# Altium PCB STM32F030.PcbDoc
Units mil, origin at the board's own origin, x right, y up, seen from the top; angles counter-clockwise.
Board outline 3555 x 3160 mil, 2 copper layers (Top Layer, Bottom Layer); 57 components, 68 nets, 257 pads, 42 vias.
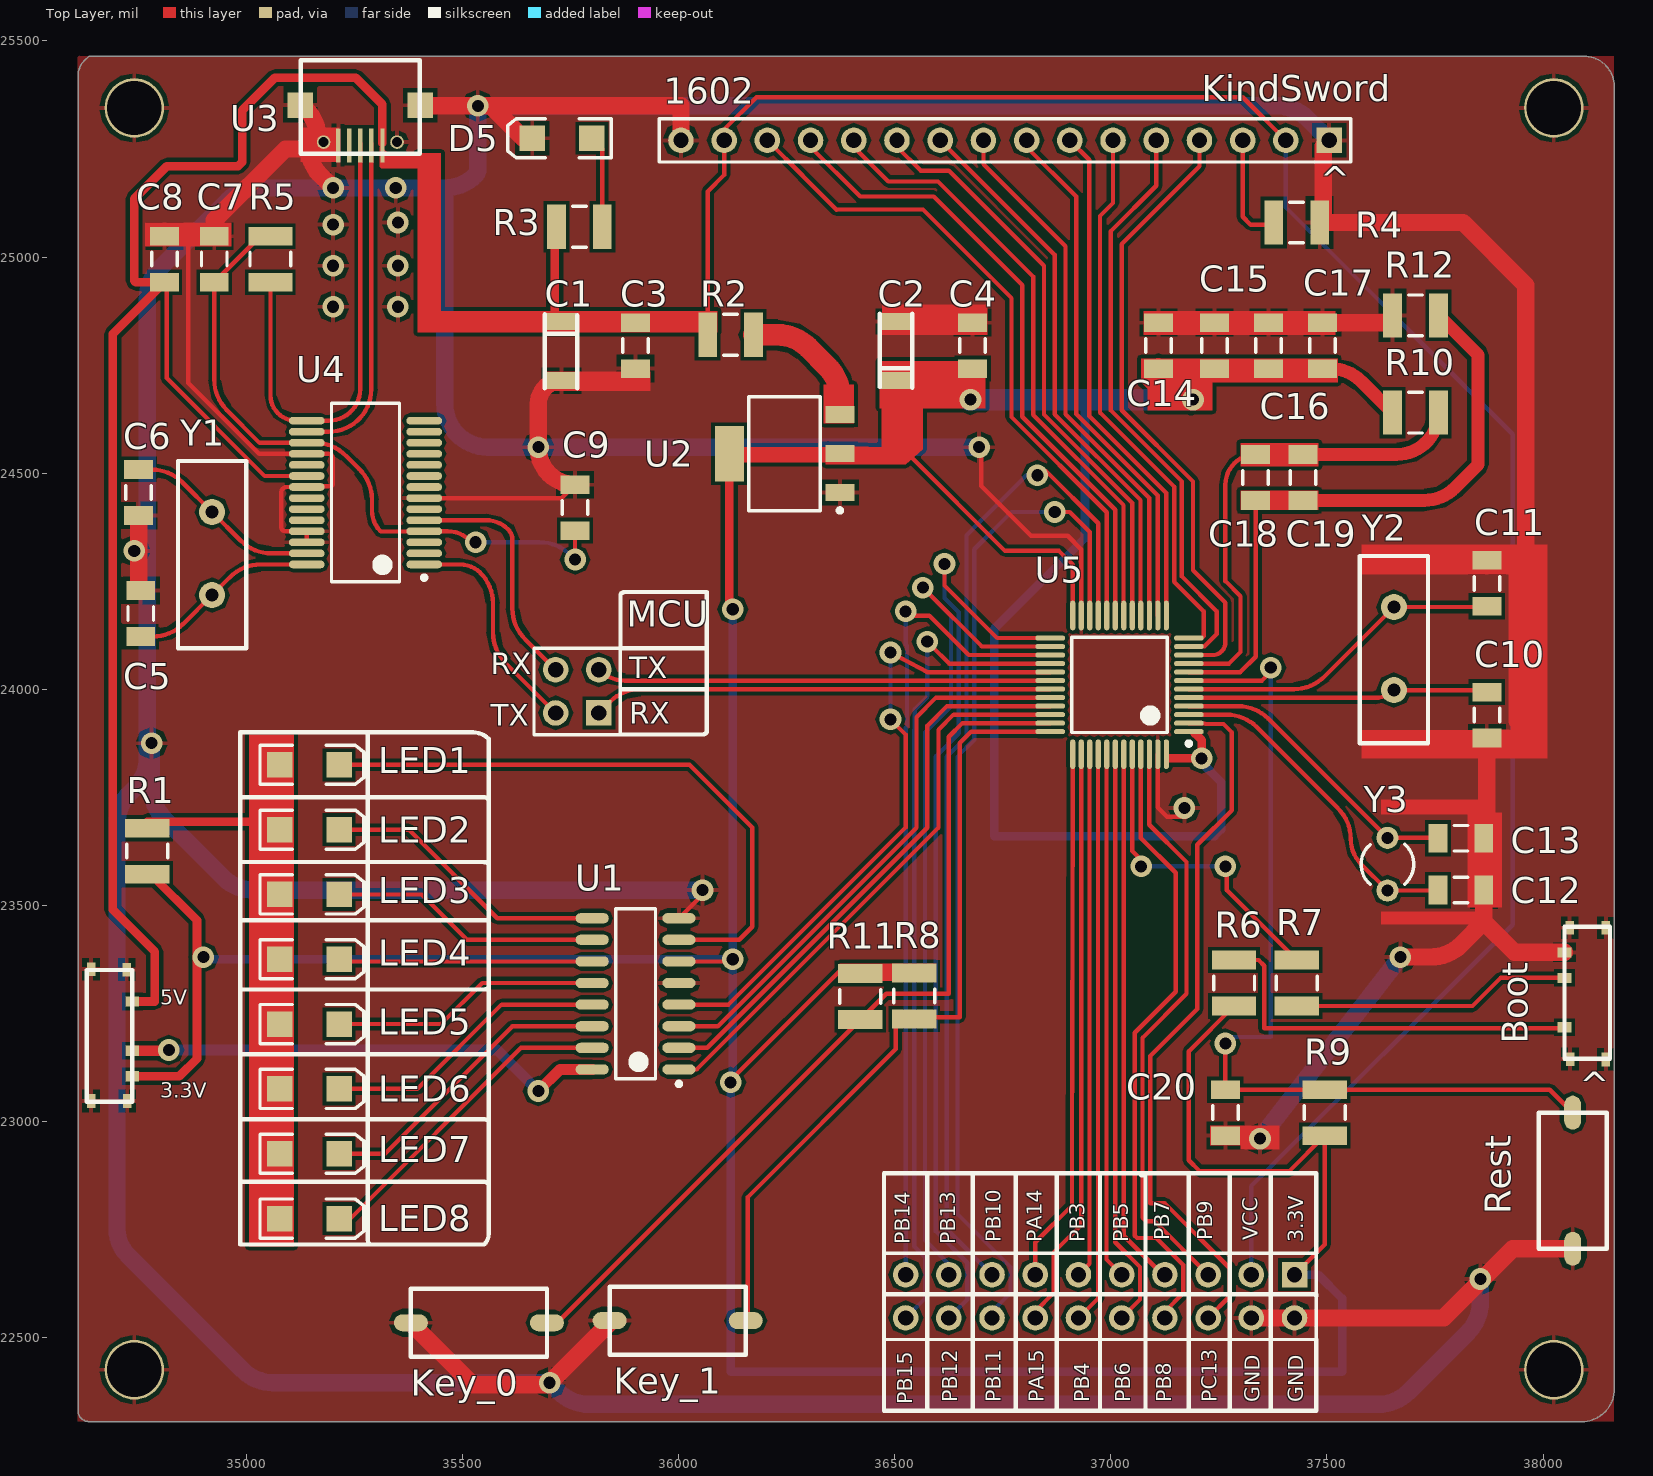
[diagram p0: Top Layer view]
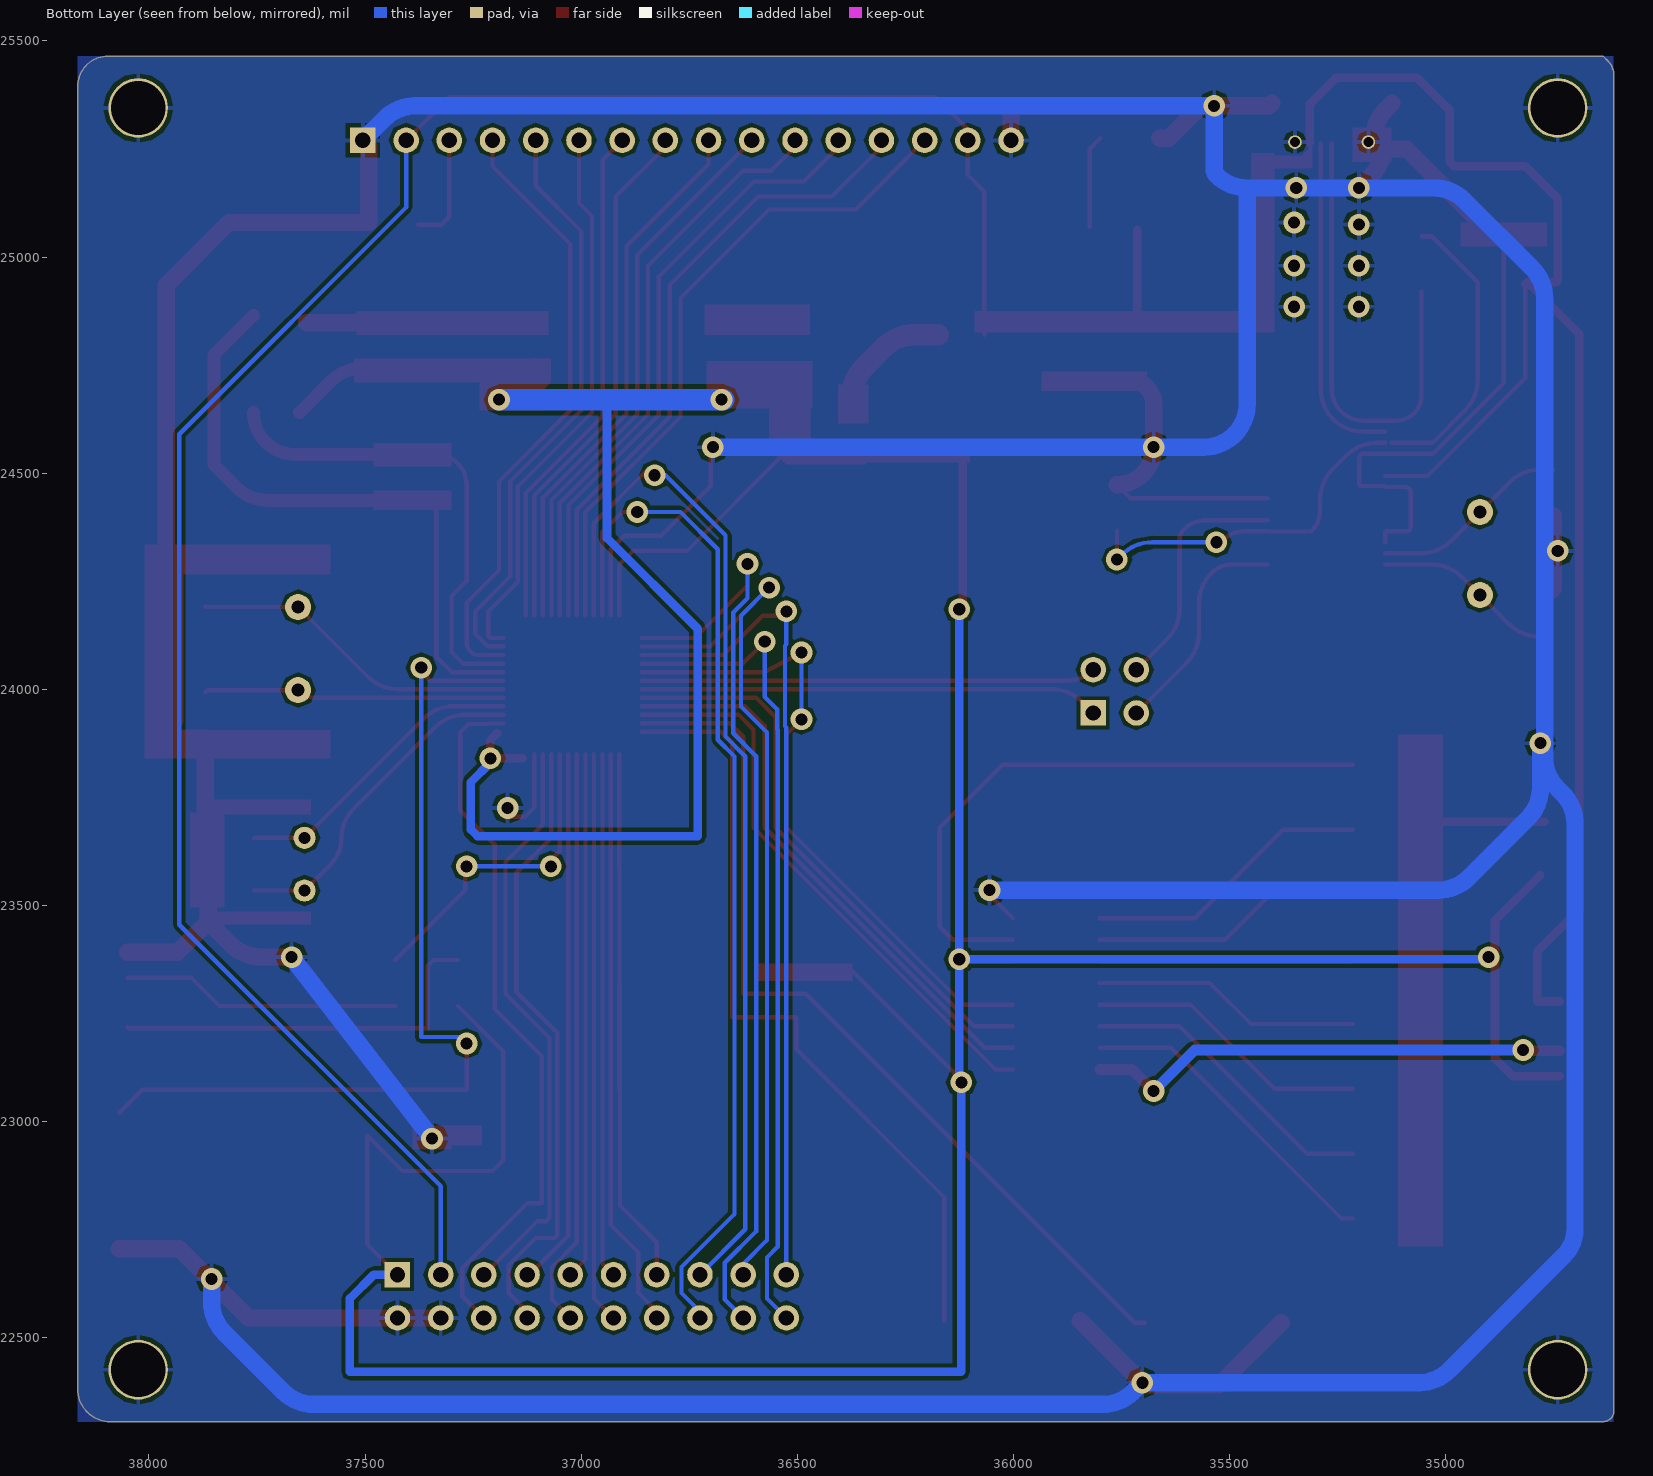
[diagram p1: Bottom Layer view, seen from below]

## Layer stack, top to bottom
Top Layer: signal copper 1.4
Dielectric: dielectric 12.6, FR-4, Dk 4.8
Bottom Layer: signal copper 1.4

## Board outline
34635,25465 34622.93,25452.93 ccw(c34654.14,25421.72) 34610,25421.72 34610,22340 34610,22330 ccw(c34635,22330) 34635,22305 38090,22305 ccw(c38090,22380) 38165,22380 38165,25395 ccw(c38095,25395) 38095,25465

## Design rules (kind name [scope] priority, off if disabled: settings)
Clearance chip_stm32 [InComponent('U5') vs InComponent('U5')] p1: gap=5
Clearance chip_pl2303 [InComponent('U4') vs InComponent('U4')] p2: gap=5
Clearance chip_pl2303_1 [(InComponent('U4') AND InComponent('U5')) vs InPolygon] p3: gap=5
Clearance [All] p4: gap=8
PolygonConnect [All] p1: connectstyle=Relief reliefconductorwidth=10 reliefentries=4 polygonreliefangle="90 Angle" airgapwidth=10
RoutingVias [All] p1: holewidth=28 width=50 viastyle="Through Hole" minholewidth=28 minwidth=50 maxholewidth=28 maxwidth=50
SolderMaskExpansion [All] p1: expansion=4
Width w_vcc [InNet('USB-VCC')] p1: maxlimit=50 minlimit=10 preferedwidth=20
Width w_gnd [InNet('GND')] p2: maxlimit=100 minlimit=10 preferedwidth=40
Width [All] p3: maxlimit=100 minlimit=10 preferedwidth=10
28 further rules are at their usual default settings.

## Classes and differential pairs
component class STM32核心板: C10 C11 C12 C13 C14 C15 C16 C17 C18 C19 C20 R6 R7 R8 R9 R10 R11 R12 U5 Y2 Y3
component class 电源串口: 1602 C1 C2 C3 C4 C5 C6 C7 C8 C9 D5 LED1 LED2 LED3 LED4 LED5 LED6 LED7 LED8 MCU R1 R2 R3 R4 R5 U1 U2 U4 Y1
differential pair class USB: USB_D

## Components (designator, comment, footprint, x,y, rotation, side; value= is the part's Value field where it differs from the comment)
1602 "Header 16" HDR1X16 37505,25270 r180 top (schematic designator P1)
Boot "七脚拨动开关" 七脚拨动开关 38155,23450 r270 top (schematic designator H2)
C1 "47uF" A型坦电容 35690,24710 r90 top
C2 "47uF" A型坦电容 36540,24855 r270 top
C3 "Cap Semi" C1206 35900,24795 r90 top
C4 "Cap Semi" C1206 36680,24795 r270 top
C5 "Cap Semi" C1206 34755,24175 r90 top
C6 "Cap Semi" C1206 34750,24455 r270 top
C7 "Cap Semi" C1206 34925,24995 r90 top
C8 "Cap Semi" C1206 34810,24995 r90 top
C9 "Cap Semi" C1206 35760,24420 r90 top
C10 "Cap Semi" C1206 37870,23940 r90 top
C11 "Cap Semi" C1206 37870,24245 r270 top
C12 "Cap Semi" C1206 37810,23535 r180 top
C13 "Cap Semi" C1206 37810,23655 r180 top
C14 "Cap Semi" C1206 37110,24795 r270 top
C15 "Cap Semi" C1206 37240,24795 r270 top
C16 "Cap Semi" C1206 37365,24795 r270 top
C17 "Cap Semi" C1206 37490,24795 r270 top
C18 "Cap Semi" C1206 37335,24490 r90 top
C19 "Cap Semi" C1206 37445,24490 r90 top
C20 "Cap Semi" C1206 37265,23020 r90 top
D5 "LED2" 3.2X1.6X1.1 35730,25275 r180 top
H1 "七脚拨动开关" 七脚拨动开关 34630,23045 r90 top
Key_0 "微动开关" 微动开关 35695,22455 r180 top (schematic designator H5)
Key_1 "微动开关" 微动开关 36155,22460 r180 top (schematic designator H3)
LED1 "LED2" 3.2X1.6X1.1 35145,23825 r0 top (schematic designator D9)
LED2 "LED2" 3.2X1.6X1.1 35145,23675 r0 top (schematic designator D8)
LED3 "LED2" 3.2X1.6X1.1 35145,23525 r0 top (schematic designator D7)
LED4 "LED1" 3.2X1.6X1.1 35145,23375 r0 top (schematic designator D6)
LED5 "LED2" 3.2X1.6X1.1 35145,23225 r0 top (schematic designator D4)
LED6 "LED2" 3.2X1.6X1.1 35145,23075 r0 top (schematic designator D3)
LED7 "LED2" 3.2X1.6X1.1 35145,22925 r0 top (schematic designator D2)
LED8 "LED2" 3.2X1.6X1.1 35145,22775 r0 top (schematic designator D1)
MCU "Header 2X2" HDR2X2 35815,23945 r90 top (schematic designator P2)
P3 "Header 10X2" HDR2X10 37425,22645 r180 top
R1 "Res3" 14-1210 34770,23625 r270 top
R2 "Res3" 14-1210 36120,24820 r0 top
R3 "Res3" 14-1210 35770,25070 r0 top
R4 "Res3" 14-1210 37430,25080 r180 top
R5 "Res3" 14-1210 35055,24995 r270 top
R6 "Res3" 14-1210 37285,23320 r270 top
R7 "Res3" 14-1210 37430,23320 r270 top
R8 "Res3" 14-1210 36545,23290 r270 top
R9 "Res3" 14-1210 37495,23020 r90 top
R10 "Res3" 14-1210 37705,24640 r0 top
R11 "Res3" 14-1210 36420,23288.86 r270 top
R12 "Res3" 14-1210 37705,24865 r0 top
Rest "微动开关" 微动开关 37990,22705 r90 top (schematic designator H4)
U1 "74HC138" 74HC138 35900,23295 r180 top
U2 "AMS1117-3.3V" AMS1117 36245,24545 r180 top
U3 "USB母座" MicroUSB母座 35273,25361 r0 top
U4 "PL2303HX" PL2303HX 35275,24455 r180 top
U5 "STM32F030" TSQFP50P900X900X160-48N 37020,24010 r180 top
Y1 "12MHZ" 晶振 34920,24410 r270 top
Y2 "8MHZ" 晶振 37655,24190 r270 top
Y3 "XTAL" R38 37640,23595 r0 top

## Footprints (in the part's own frame and the unit in brackets; to place one, negate y for a bottom-side part, rotate by r counter-clockwise, add the part's x,y. Pads: shape width x height; smd on the part's side, far side on the other; paste and mask are expansions set on the pad)
3.2X1.6X1.1 [mm] "SMT LED; 2 Flat Leads"
  rect 1.5x1.5 smd: 1(-1.75,0) 2(1.75,0)
  silkscreen extent -2.9,-1.15 3.2,1.15
14-1210 [mm] "Chip Resistor, Body 3.2x2.5mm, IPC High Density"
  rect 1.1x2.6 smd: 1(-1.35,0) 2(1.35,0)
  silkscreen extent -0.4,-1.2 0.4,1.2, body extent -1.68,-1.32 1.68,1.32, height 0.9
74HC138 [mm] "SOP, 16-Leads, Body 9.90x3.90mm, Pitch 1.27mm, IPC Medium Density"
  oval 1.95x0.6 smd: 1(-2.55,4.445) 2(-2.55,3.175) 3(-2.55,1.905) 4(-2.55,0.635) 5(-2.55,-0.635) 6(-2.55,-1.905) 7(-2.55,-3.175) 8(-2.55,-4.445) 9(2.55,-4.445) 10(2.55,-3.175) 11(2.55,-1.905) 12(2.55,-0.635) 13(2.55,0.635) 14(2.55,1.905) 15(2.55,3.175) 16(2.55,4.445)
  silkscreen extent -2.68,-5 1.17,5.42, body extent -2,-5 2,5, height 1.75
AMS1117 [mm] "SOT223, 4-Leads, Body 6.50x7.00mm (avg), Pitch 2.29mm, IPC Medium Density"
  rect 1.7x1 smd: 1(-3.25,2.29) 2(-3.25,0) 3(-3.25,-2.29)
  rect 1.7x3.25 smd: 2(3.25,0)
  silkscreen extent -3.38,-3.35 2.1,3.46, body extent -1.86,-3.35 1.86,3.35, height 1.8
A型坦电容 [mm]
  rect 1x1.8 smd: 0(0.1,-0.975) 1(3.575,-0.975)
  silkscreen extent -0.35,-1.9 4,0
C1206 [mm] "Chip Capacitor, Body 3.2x1.6mm, IPC High Density"
  rect 1.1x1.7 smd: 1(-1.35,0) 2(1.35,0)
  silkscreen extent -0.4,-0.75 0.4,0.75, body extent -1.7,-0.9 1.7,0.9, height 1.3
HDR1X16 [mm] "Connector; Header; 16 Position"
  rect 1.5x1.5 hole 0.9: 1(0,0)
  round 1.5 hole 0.9: 2(2.54,0) 3(5.08,0) 4(7.62,0) 5(10.16,0) 6(12.7,0) 7(15.24,0) 8(17.78,0) 9(20.32,0) 10(22.86,0) 11(25.4,0) 12(27.94,0) 13(30.48,0) 14(33.02,0) 15(35.56,0) 16(38.1,0)
  silkscreen extent -1.27,-1.27 39.37,1.27
HDR2X2 [mm] "Connector; Header; 2x2 Position"
  rect 1.5x1.5 hole 0.9: 1(0,0)
  round 1.5 hole 0.9: 2(0,2.54) 3(2.54,0) 4(2.54,2.54)
  silkscreen extent -1.27,-1.27 3.81,3.81
HDR2X10 [mm] "Connector; Header; 10x2 Position"
  rect 1.5x1.5 hole 0.9: 1(0,0)
  round 1.5 hole 0.9: 2(0,2.54) 3(2.54,0) 4(2.54,2.54) 5(5.08,0) 6(5.08,2.54) 7(7.62,0) 8(7.62,2.54) 9(10.16,0) 10(10.16,2.54) 11(12.7,0) 12(12.7,2.54) 13(15.24,0) 14(15.24,2.54) 15(17.78,0) 16(17.78,2.54) 17(20.32,0) 18(20.32,2.54) 19(22.86,0) 20(22.86,2.54)
  silkscreen extent -1.27,-1.27 24.13,3.81
MicroUSB母座 [mm]
  rect 0.25x2 smd: 1(1.046,-2.6) 2(0.396,-2.6) 3(-0.254,-2.6) 4(-0.904,-2.6) 5(-1.554,-2.6)
  rect 1.5x1.5 smd: GND(-3.779,-0.25) GND(3.271,-0.25)
  round 0.8 hole 0.6: GND(-2.413,-2.413) GND(1.905,-2.413)
  silkscreen extent -3.75,-3.1 3.25,2.4
PL2303HX [mm] "SOP, 28-Leads, Body 10.20x5.30mm, Pitch 0.65mm, IPC Medium Density"
  oval 2.1x0.45 smd: 1(-3.45,4.225) 2(-3.45,3.575) 3(-3.45,2.925) 4(-3.45,2.275) 5(-3.45,1.625) 6(-3.45,0.975) 7(-3.45,0.325) 8(-3.45,-0.325) 9(-3.45,-0.975) 10(-3.45,-1.625) 11(-3.45,-2.275) 12(-3.45,-2.925) 13(-3.45,-3.575) 14(-3.45,-4.225) 15(3.45,-4.225) 16(3.45,-3.575) 17(3.45,-2.925) 18(3.45,-2.275) 19(3.45,-1.625) 20(3.45,-0.975) 21(3.45,-0.325) 22(3.45,0.325) 23(3.45,0.975) 24(3.45,1.625) 25(3.45,2.275) 26(3.45,2.925) 27(3.45,3.575) 28(3.45,4.225)
  silkscreen extent -3.58,-5.25 2,5.25, body extent -2.8,-5.25 2.8,5.25, height 2
R38 [mm] "Crystal, Thru-Hole; 2 Leads; Body 3.1 x 8.2 mm (Dia.xH)"
  round 1.3 hole 0.7: 1(0,1.55) 2(0,-1.55)
  silkscreen extent -1.55,-1.19 1.55,1.17
TSQFP50P900X900X160-48N [mm] "TSQFP, 48-Leads, Body 7.00x7.30mm, Pitch 0.50mm, IPC Medium Density"
  oval 1.75x0.3 smd: 1(-4.075,2.75) 2(-4.075,2.25) 3(-4.075,1.75) 4(-4.075,1.25) 5(-4.075,0.75) 6(-4.075,0.25) 7(-4.075,-0.25) 8(-4.075,-0.75) 9(-4.075,-1.25) 10(-4.075,-1.75) 11(-4.075,-2.25) 12(-4.075,-2.75) 25(4.075,-2.75) 26(4.075,-2.25) 27(4.075,-1.75) 28(4.075,-1.25) 29(4.075,-0.75) 30(4.075,-0.25) 31(4.075,0.25) 32(4.075,0.75) 33(4.075,1.25) 34(4.075,1.75) 35(4.075,2.25) 36(4.075,2.75)
  oval 0.3x1.75 smd: 13(-2.75,-4.075) 14(-2.25,-4.075) 15(-1.75,-4.075) 16(-1.25,-4.075) 17(-0.75,-4.075) 18(-0.25,-4.075) 19(0.25,-4.075) 20(0.75,-4.075) 21(1.25,-4.075) 22(1.75,-4.075) 23(2.25,-4.075) 24(2.75,-4.075) 37(2.75,4.075) 38(2.25,4.075) 39(1.75,4.075) 40(1.25,4.075) 41(0.75,4.075) 42(0.25,4.075) 43(-0.25,4.075) 44(-0.75,4.075) 45(-1.25,4.075) 46(-1.75,4.075) 47(-2.25,4.075) 48(-2.75,4.075)
  silkscreen extent -4.2,-2.8 2.8,3.57, body extent -3.5,-3.65 3.5,3.65, height 1.6
七脚拨动开关 [mm]
  rect 0.6x0.8 smd: 1(1.5,-2.675) 2(3,-2.675) 3(5.9,-2.675)
  rect 0.8x0.5 smd: GND(0.05,-0.25) GND(0.05,-2.375) GND(7.775,-2.35) GND(7.8,-0.25)
  silkscreen extent 0,-2.68 7.75,0
微动开关 [mm]
  oval 2x1 smd: 1(0,-2) 2(8,-2)
  silkscreen extent 0,-4 8,0
晶振 [mil]
  round 60 hole 30: 1(0,0) 2(192.13,0)
  silkscreen extent -118,-79 315,79

## Part data
1602: "Header, 16-Pin"
Boot H1 Key_0 Key_1 Rest: "H?"
C1 C2: library part A型坦电容
C3 C4 C5 C6 C7 C8 C9 C10 C11 C12 C13 C14 C15 C16 C17 C18 C19 C20: "Capacitor (Semiconductor SIM Model)"
D5 LED1 LED2 LED3 LED5 LED6 LED7 LED8: "Typical RED, GREEN, YELLOW, AMBER GaAs LED"
LED4: library part LED2, "Typical RED, GREEN, YELLOW, AMBER GaAs LED"
MCU: "Header, 2-Pin, Dual row"
P3: "Header, 10-Pin, Dual row"
R1 R2 R3 R4 R5 R6 R7 R8 R9 R10 R11 R12: "Resistor"
U2: library part AMS1117
U3: library part MicroUSB母座, "U?"
U5: library part STM32F030C8T6, "U?"
Y1 Y2: library part 晶振, "Y?"
Y3: "Crystal Oscillator"

## Free pads (board coordinates)
  round 137.8 hole 125.98: GND(34740,22425) GND(34740,25345) GND(38025,22425) GND(38025,25345)

## Via types
v1: diameter 50, hole 28, Top Layer to Bottom Layer, 42 vias

## Nets (pads, with @x,y where several pads share a name; then routed paths per layer and width w, separated by ;. In a path a pad name is that pad's centre, name@x,y a point inside that pad or via, vN(x,y) a via of type N, cw(c..) or ccw(c..) an arc to the next point about the centre after c; other vN are vias at no path point)
BOOT0: R7.1 U5.44 | length 726.2
  Top Layer w10: U5.44 37049.53,23625.47 v1@37065,23610 ; v1(37265,23590) 37268.15,23586.85 37268.15,23535 R7.1
  Bottom Layer w10: v1(37070,23590) v1(37265,23590)
GND: 1602.1 1602.16 Boot.1 Boot.GND C1.0 C2.0 C3.1 C4.1 C5.2 C6.2 C7.2 C8.2 C9.2 C10.1 C11.1 C12.1 C13.1 C14.1 C15.1 C16.1 C17.1 C20.1 D5.2 H1.GND Key_0.2 Key_1.2 P3.2 P3.4 pad.GND R4.1 R12.1 Rest.1 U1.5 U1.8 U2.1 U3.5 U3.GND U4.7 U4.18 U4.21 U4.25 U4.26 U5.23 U5.47 | length 20998.3
  Top Layer w10: 34865,25045 34865,24708.74 35029.17,24544.57 U4.18 35186.05,24544.57 ; U4.26 U4.25@35139.17,24365 ; U4.25 35089.4,24365.43 cw(c35089.4,24374.83) 35080,24374.83 35080,24455 cw(c35092.8,24455) 35092.8,24467.8 U4.21 cw(c35141.38,24467.8) 35141.38,24470 35195,24470 ccw(c35195,24474.27) 35199.27,24474.27 35199.27,24535 ccw(c35189.7,24535) 35189.7,24544.57 ; U4.7 35729.06,24442.2 C9.2 ; U1.8 36047.65,23517.26 ccw(c36029.91,23535) v1(36055,23535) ; v1@36700,24550 36700,24470 36815,24355 36900,24355 36931.42,24323.58 U5.23 ; U5.47 37108.58,23726.42 37130,23705 v1@37175,23705 ; C20.1@37289.85,22960 v1@37330,22960 ; R12.1@37635,24848.15 ccw(c37635,24865) R12.1 ; C13.1 ccw(c37846.61,23671.54) C13.1@37870,23671.54 ; C11.1@37872.04,24298.15 cw(c37872.04,24202.04) 37940,24270 ; 37917.4,23886.85 ccw(c37917.4,23897.6) 37925,23890 ccw(c37888.79,23926.21) 37940,23926.21
  Top Layer w40: C6.2 34750,24233.15 C5.2 ; C7.2 34925,25085 35090,25250 35145,25250 ccw(c35229.5,25250) 35169.75,25190.25 v1(35200,25160) ; U3.GND@35124.02,25355.67 35136.94,25342.75 cw(c35069.19,25275) 35165,25275 ; Key_0.2 35523.78,22390 35696.3,22390 v1(35701.3,22395) Key_1.2@35845.04,22538.74 ; U3.GND@35401.57,25355.67 35407.24,25350 v1(35535,25350) 35565,25350 ; D5.2 35640,25275 35565,25350 ; C1.0 ccw(c35728.39,24660.55) 35675,24660.55 v1(35675,24560) 35675,24558.15 ccw(c35760,24558.15) C9.2 ; 1602.16 36005,25350 35565,25350 ; P3.4 P3.2 37770,22545 37930,22705 Rest.1 ; C17.1 R12.1@37635,24848.15 ; 1602.1 37491.61,25256.61 37491.61,25080 37815,25080 37960,24935 37960,24300 ; v1(37670,23380) 37739.88,23380 ccw(c37739.88,23480) 37810.59,23409.29 37863.15,23461.85 ; C13.1 C12.1 37863.15,23461.85 ; C13.1@37870,23671.54 C10.1 37917.4,23886.85 ; C11.1 C11.1@37872.04,24298.15 ; 37940,23926.21 37940,24270 ; Boot.1 37934.06,23390.94 37863.15,23461.85
  Bottom Layer w40: v1(34780,23875) 34780,23771.42 ccw(c34880,23771.42) 34809.29,23700.71 34945.71,23564.29 ccw(c35016.42,23635) 35016.42,23535 v1(36055,23535) ; v1(36695,24560) v1(35675,24560) 35558.58,24560 cw(c35558.58,24660) 35458.58,24660 35458.58,25160 ; v1(37345,22960) v1(37670,23380) ; 1602.1 37454.29,25320.71 ccw(c37383.58,25250) 37383.58,25350 v1(35535,25350) 35535,25203.08 cw(c35515.5,25203.08) 35529.29,25189.29 cw(c35458.58,25260) 35458.58,25160 ; v1(37855,22635) 37855,22581.42 cw(c37755,22581.42) 37825.71,22510.71 37689.29,22374.29 cw(c37618.58,22445) 37618.58,22345 35792.72,22345 cw(c35792.72,22445) 35722.01,22374.29 v1(35701.3,22395) 35061.42,22395 cw(c35061.42,22495) 34990.71,22424.29 34725,22690 cw(c34785.36,22750.36) 34700,22750.36 34700,23688.58 cw(c34800,23688.58) 34729.29,23759.29 34740.71,23770.71 ccw(c34670,23841.42) 34770,23841.42 34770,24320 34770,24903.58 cw(c34870,24903.58) 34799.29,24974.29 34955.71,25130.71 cw(c35026.42,25060) 35026.42,25160 v1(35200,25160) v1(35345,25160) 35458.58,25160
  other v1: 37170,23725 34740,24320 35200,24885 35350,24885 35200,24980 35350,24980 35200,25075 35350,25080
KEY_0: Key_0.1 R11.2 U5.35 | length 2087.9
  Top Layer w10: Key_0.1 35718.74,22533.74 36480,23295 36625,23295 36625,23890 36656.42,23921.42 U5.35
KEY_1: Key_1.1 R8.2 U5.36 | length 1846.4
  Top Layer w10: Key_1.1@36160,22538.74 36160,22825 36502.24,23167.24 36502.24,23241.1 36650,23241.1 36650,23875 36676.73,23901.73 U5.36
MCU_38_A0: U1.1 U5.34 | length 1331.9
  Top Layer w10: U1.1 36041.37,23120 36601,23679.63 36601,23906 36636.1,23941.1 U5.34
MCU_38_A1: U1.2 U5.33 | length 1324.9
  Top Layer w10: U1.2 36065.91,23170 36575,23679.09 36575,23915 36620.79,23960.79 U5.33
MCU_38_A2: U1.3 U5.32 | length 1323.8
  Top Layer w10: U1.3 36090.46,23220 36550,23679.54 36550,23935 36595.47,23980.47 U5.32
MCU_38_E: U1.4 U5.29 | length 1494.9
  Top Layer w10: U1.4 36115,23270 36525,23680 36525,23895 v1(36490,23930) ; v1(36490,24085) 36575,24039.53 U5.29
  Bottom Layer w10: v1(36490,23930) v1(36490,24085)
MCU_LCD_DB0: 1602.7 U5.13 | length 1192
  Top Layer w10: 1602.7 36950,25225 36950,24632.28 37128.27,24454.01 U5.13
MCU_LCD_DB1: 1602.8 U5.14 | length 1225.3
  Top Layer w10: 1602.8 36805,25255 36920,25140 36920,24636.82 37108.58,24448.24 U5.14
MCU_LCD_DB2: 1602.9 U5.15 | length 1258.6
  Top Layer w10: 1602.9 36705,25215 36895,25025 36895,24636.37 37088.9,24442.47 U5.15
MCU_LCD_DB3: 1602.10 U5.16 | length 1290.7
  Top Layer w10: 1602.10 36870,25005 36870,24635.91 37068.43,24437.48 U5.16@37068.43,24171.21
MCU_LCD_DB4: 1602.11 U5.17 | length 1363.2
  Top Layer w10: 1602.11 36505,25255 36560,25200 36625,25200 36845,24980 36845,24635.46 37049.53,24430.93 U5.17
MCU_LCD_DB5: 1602.12 U5.18 | length 1425.8
  Top Layer w10: 1602.12 36405,25255 36485,25175 36600,25175 36820,24955 36820,24635 37029.06,24425.94 37029.06,24171.21 U5.18
MCU_LCD_DB6: 1602.13 U5.19 | length 1491.2
  Top Layer w10: 1602.13 36305,25255 36420,25140 36590,25140 36795,24935 36795,24630.46 37010.16,24415.3 U5.19
MCU_LCD_DB7: 1602.14 U5.20 | length 1543
  Top Layer w10: 1602.14 36287,25188 36287,25187.54 36365,25109.54 36365,25110 36565,25110 36770,24905 36770,24630 36990.47,24409.53 U5.20
MCU_LCD_E: 1602.6 U5.12 | length 1295.4
  Top Layer w10: 1602.6 37005,25125 36975,25095 36975,24640 37146.27,24468.73 37146.27,24248.73 37215,24180 37215,24123.01 37210.26,24118.27 U5.12
MCU_LCD_RS: 1602.4 U5.10 | length 1436.8
  Top Layer w10: U5.10 37235,24078.9 ccw(c37235,24108.9) 37265,24108.9 37265,24200 37190,24275 37190,24480.46 37025,24645.46 37025,25030 37205,25210 1602.4
MCU_LCD_WR: 1602.5 U5.11 | length 1365.2
  Top Layer w10: 1602.5 37105,25165 37000,25060 37000,24645 37164.27,24480.73 37164.27,24260.73 37245,24180 37245,24127.55 37216.81,24099.36 U5.11@37180.44,24099.36 ; U5.11@37180.44,24099.36 ccw(c37209.41,24098.58) U5.11 cw(c37221.85,24098.58) U5.11@37180.44,24099.36
MCU_RXD: MCU.1 U5.31 | length 1063.1
  Top Layer w10: MCU.1 35840.87,23970.87 cw(c35911.58,23900.16) 35911.58,24000.16 U5.31
MCU_TXD: MCU.3 U5.30 | length 1051.3
  Top Layer w10: MCU.3 ccw(c35875.74,24105.74) 35875.74,24019.84 U5.30
Net1602_3: 1602.3 R4.2 | length 256.1
  Top Layer w10: 1602.3 37305,25093.39 37323.39,25075 R4.2@37376.85,25075
NetC5_1: C5.1 U4.28 Y1.2 | length 444.7
  Top Layer w10: C5.1 34782.55,24121.85 ccw(c34782.55,24221.85) 34853.27,24151.14 Y1.2 34961.5,24259.37 cw(c35032.21,24188.66) 35032.21,24288.66 U4.28
NetC6_1: C6.1 U4.27 Y1.1 | length 460.9
  Top Layer w10: C6.1 34780.43,24508.15 cw(c34780.43,24408.15) 34851.14,24478.86 Y1.1 34986.46,24343.54 ccw(c35057.17,24414.25) 35057.17,24314.25 U4.27
NetD5_1: D5.1 R3.2 | length 215
  Top Layer w10: D5.1 35823.15,25250.75 R3.2
NetH1_2: H1.2 U1.16 | length 1125.1
  Top Layer w10: v1@34818.11,23163.11 v1(34820,23165)
  Top Layer w25: H1.2 v1@34818.11,23163.11 ; v1(35675,23070) 35725,23120 U1.16
  Bottom Layer w25: v1(34820,23165) 35580,23165 v1(35675,23070)
NetH2_2: Boot.2 R7.2 | length 646.6
  Top Layer w10: R7.2 37836.85,23266.85 37901.89,23331.89 Boot.2
NetH2_3: Boot.3 R6.1 | length 916.3
  Top Layer w10: R6.1 37341.85,23373.15 37355,23360 37355,23215 38046.97,23215 Boot.3
NetLED1_1: LED1.1 LED2.1 LED3.1 LED4.1 LED5.1 LED6.1 LED7.1 LED8.1 R1.1 | length 267.8
  Top Layer w10: 35028.15,23693.15 35035,23700
  Top Layer w20: R1.1@34770,23693.15 35028.15,23693.15
NetLED1_2: LED1.2 U1.7 | length 1428.2
  Top Layer w10: LED1.2 36025,23825 36170,23680 36170,23450 36140,23420 U1.7
NetLED2_2: LED2.2 U1.9 | length 670.6
  Top Layer w10: LED2.2 35375,23675 35580,23470 U1.9
NetLED3_2: LED3.2 U1.10 | length 629.2
  Top Layer w10: LED3.2 35405,23525 35510,23420 U1.10
NetLED4_2: LED4.2 U1.11 | length 587.8
  Top Layer w10: LED4.2 35218.9,23370 U1.11
NetLED5_2: LED5.2 U1.12 | length 625.1
  Top Layer w10: LED5.2 35450,23225 35545,23320 U1.12
NetLED6_2: LED6.2 U1.13 | length 666.5
  Top Layer w10: LED6.2 35395,23075 35590,23270 U1.13
NetLED7_2: LED7.2 U1.14 | length 707.9
  Top Layer w10: LED7.2 35320,22925 35615,23220 U1.14
NetLED8_2: LED8.2 U1.15 | length 749.3
  Top Layer w10: LED8.2 35240,22775 35635,23170 U1.15
NetR2_2: R2.2 U2.3 | length 294.9
  Top Layer w50: R2.2 36228.58,24820 cw(c36228.58,24720) 36299.29,24790.71 36343.66,24746.34 cw(c36272.95,24675.63) 36372.95,24675.63 ; U2.3@36375.91,24645.31 36375.91,24665
NRST: C20.2 R9.2 Rest.2 U5.7 | length 2089.7
  Top Layer w10: U5.7 37349.84,24019.84 v1@37365,24035 ; v1(37265,23180) C20.2 R9.2 38015.55,23073.15 Rest.2
  Bottom Layer w10: v1(37265,23180) 37280,23195 37370,23195 v1(37370,24050)
OSC32_IN: C12.2 U5.3 Y3.2 | length 777.7
  Top Layer w10: U5.3 37267.48,23941.1 cw(c37267.48,23841.1) 37338.19,23911.81 37525.71,23724.29 cw(c37455,23653.58) 37555,23653.58 ccw(c37638.54,23653.58) 37579.47,23594.51 Y3.2 37754.38,23533.98 ccw(c37754.38,23537.47) C12.2
OSC32_OUT: C13.2 U5.4 Y3.1 | length 698.6
  Top Layer w10: U5.4 37293.81,23960.79 cw(c37293.81,23860.79) 37364.53,23931.5 Y3.1 37754.38,23656.02 cw(c37754.38,23652.53) C13.2
OSC_IN: C10.2 U5.5 Y2.2 | length 695.6
  Top Layer w10: U5.5 37410,23980 37611.85,23980 ccw(c37611.85,24041.03) Y2.2 37858.59,23997.87 cw(c37858.59,23981.74) C10.2
OSC_OUT: C11.2 U5.6 Y2.1 | length 764.5
  Top Layer w10: U5.6 37405,24000 37423.58,24000 ccw(c37423.58,24100) 37494.29,24029.29 Y2.1 37865.53,24190 ccw(c37865.53,24196.32) C11.2
PA14: P3.13 U5.37 | length 1239.8
  Top Layer w10: P3.13 36825,22719.92 36910.08,22805 U5.37
PA15: P3.14 U5.38 | length 1348.6
  Top Layer w10: P3.14 36825,22559.94 36867.53,22602.47 36867.53,22696.11 36931.42,22760 U5.38
PB3: P3.11 U5.39 | length 1215.4
  Top Layer w10: P3.11 36950.32,22670.32 36950.32,23848.79 U5.39
PB4: P3.12 U5.40 | length 1323.5
  Top Layer w10: P3.12 36970.01,22590.01 36970.01,23848.79 U5.40
PB5: P3.9 U5.41 | length 1219.5
  Top Layer w10: U5.41 36989.69,23848.79 36989.69,22680.31 P3.9
PB6: P3.10 U5.42 | length 1345.9
  Top Layer w10: U5.42 37010.16,22719.99 37067.53,22662.62 37067.53,22587.53 P3.10
PB7: P3.7 U5.43 | length 1247
  Top Layer w10: U5.43 37029.84,22735 37119.84,22645 P3.7
PB8: P3.8 U5.45 | length 1467.8
  Top Layer w10: U5.45 37069.21,23655.79 37150,23575 37150,23300 37055,23205 37055,22735.3 37060.3,22730 37105,22730 37167.53,22667.47 37167.53,22602.47 37125,22559.94 P3.8
PB9: P3.5 U5.46 | length 1357.2
  Top Layer w10: U5.46 37088.9,23686.1 37175,23600 37175,23295 37073,23193 37073,22777 37081,22769 37101,22769 P3.5
PB10: P3.15 U5.21 | length 2379.7
  Top Layer w10: v1@36850,24505 36970.79,24384.21 U5.21
  Bottom Layer w10: P3.15 36620,22750 36620,23844.54 36666,23890.54 36666,24356 36805,24495 v1(36830,24495)
PB11: P3.16 U5.22 | length 2378.8
  Top Layer w10: v1(36870,24410) 36905,24410 36951.1,24363.9 U5.22
  Bottom Layer w10: P3.16 36725,22559.94 36767.53,22602.47 36767.53,22662.62 36645,22785.14 36645,23844.09 36684,23883.09 36684,24324 36770,24410 v1(36870,24410)
PB12: P3.18 U5.25 | length 2163.3
  Top Layer w10: v1@36615,24280 36615,24240 36736.73,24118.27 U5.25
  Bottom Layer w10: v1(36615,24290) 36615,24210.46 36648,24177.46 36648,23898 36595,23845 36595,22745 36667.53,22672.47 36667.53,22587.53 P3.18
PB13: P3.17 U5.26 | length 2001.5
  Top Layer w10: v1@36575,24225 36701.42,24098.58 U5.26
  Bottom Layer w10: v1(36565,24235) 36630,24170 36630,23960 36570,23900 36570,22725 36625,22670 P3.17
PB14: P3.19 U5.27 | length 1899.8
  Top Layer w10: v1@36535,24170 36580,24170 36671.1,24078.9 U5.27
  Bottom Layer w10: P3.19 36525,23911.26 36528,23914.26 36528,24100.74 36525,24103.74 v1(36525,24180)
PB15: P3.20 U5.28 | length 1897.9
  Top Layer w10: v1@36585,24100 36625.79,24059.21 U5.28
  Bottom Layer w10: P3.20 36570,22590 36570,22685 36545,22710 36545,23905.8 36546,23906.8 36546,23953.2 36575,23982.2 v1(36575,24110)
PC13: P3.6 U5.2 | length 1658.6
  Top Layer w10: U5.2 37181.21,23920.64 37216.81,23920.64 37218.13,23919.32 37260.68,23919.32 37280,23900 37280,23720 37200,23640 37200,23260 37091,23151 37091,22810 37125,22810 37275,22660 37275,22595 P3.6
PL_3V3: C7.1 C9.1 R5.1 U4.4 U4.17 | length 1499.7
  Top Layer w10: R5.1 35031.3,25048.15 C7.1 34925,24716.42 ccw(c35025,24716.42) 34954.29,24645.71 35030,24570 U4.17@35125,24570 ; U4.17 35158.42,24570.16 cw(c35158.42,24470.16) 35229.13,24540.87 35260.71,24509.29 cw(c35190,24438.58) 35290,24438.58 35290,24413.28 ccw(c35358.28,24413.28) 35310,24365 35409.78,24365 ccw(c35409.78,24366.48) U4.4 35465.67,24365.43 cw(c35465.67,24295.67) v1@35515,24345 ; v1(35760,24300) C9.1
  Bottom Layer w10: v1(35530,24340) 35678.58,24340 cw(c35678.58,24240) 35749.29,24310.71 v1(35760,24300)
PL_RXD: MCU.4 U4.5 | length 564.6
  Top Layer w10: U4.5 35554.24,24391.02 cw(c35554.24,24319.24) 35605,24370 cw(c35580.86,24345.86) 35615,24345.86 35615,24186.42 ccw(c35715,24186.42) 35644.29,24115.71 MCU.4
PL_TXD: MCU.2 U4.1 | length 522.9
  Top Layer w10: U4.1 35493.94,24288.66 cw(c35493.94,24222.52) 35540.71,24269.29 cw(c35470,24198.58) 35570,24198.58 35570,24131.42 ccw(c35670,24131.42) 35599.29,24060.71 MCU.2
USB-VCC: 1602.2 1602.15 C1.1 C3.2 C8.1 H1.3 P3.3 R2.1 R3.1 U3.1 U4.20 | length 8735
  Top Layer w10: C8.1@34815,24936.85 34815,24720 35041.61,24493.39 U4.20 ; R2.1 36066.85,25151.85 36105,25190 1602.15 36105,25295 36180,25370 37305,25370 1602.2
  Top Layer w20: H1.3 34787.28,23277.28 34787.28,23392.72 34690,23490 34690,24821.85 C8.1 ; C8.1@34815,24936.85 C8.1 ; U3.1@35313.98,25263.15 35313.98,25353.52 35252.5,25415 35065,25415 34990,25340 34990,25220 34980,25210 34815,25210 34740,25135 34740,24945 34743.15,24941.85 C8.1 ; C1.1@35713.39,24855.75 R3.1@35713.39,25063.46
  Bottom Layer w10: P3.3@37325,22660 37325,22850 37930,23455 37930,24590 37405,25115 1602.2
USB_D+: R5.2 U3.3 U4.15 | length 1091.7
  Top Layer w10: 35055,24920 35055,24680.35 ccw(c35114.02,24680.35) 35114.02,24621.34 U4.15 35190,24621.34 ccw(c35190,24694.13) 35262.8,24694.13 U3.3@35262.8,25263.15
USB_D-: U3.2 U4.16 | length 774.4
  Top Layer w10: U4.16 35190,24595.75 ccw(c35190,24694.13) 35288.39,24694.13 U3.2@35288.39,25263.15
VCC-3.3: C2.1 C4.2 C14.2 C15.2 C16.2 C17.2 H1.1 P3.1 R1.2 R6.2 R8.1 R9.1 R10.1 R11.1 U1.6 U2.2 U5.1 U5.24 U5.48 | length 10997.3
  Top Layer w10: U1.6 v1@36115,23370 ; v1@36125,23080 36125,23100.16 R11.1@36372.24,23347.4 ; U2.2@36372.95,24545 36470,24545 ccw(c36470,24585) 36510,24585 36510,24710.87 ccw(c36501.61,24710.87) C2.1@36501.61,24719.25 ; 36535,24540 36755,24320 36880,24320 36911.73,24288.27 U5.24 ; R6.2 37180,23161.85 37180,22910 37205,22885 37413.15,22885 R9.1 37495,22715 P3.1 ; C17.2 C17.2@37508.58,24741.85
  Top Layer w20: H1.1 34844.06,23104.06 34885,23145 34885,23465 R1.2@34780,23570 ; v1@36117.05,24192.95 U2.2@36117.05,24545 ; 37135,23840 v1(37210,23840) 37210,23882.17 U5.1@37194.65,23897.51
  Top Layer w30: C17.2@37508.58,24741.85 cw(c37508.58,24641.85) 37579.29,24712.56 R10.1
  Top Layer w50: C14.2 37181.85,24670 v1(37190,24670)
  Bottom Layer w10: v1@34895,23395 v1@34915,23375 ; v1(37190,24670) v1@37205,24685
  Bottom Layer w20: v1@34915,23375 v1(36125,23375) ; v1(36120,23090) 36120,22730 36120,22420 37535,22420 37535,22590 37480,22645 P3.1 ; v1@36125,23095 v1(36125,23375) ; v1(36125,24185) v1(36125,23375) ; 36940,24670 36940,24350 36730,24140 36730,23660 37240,23660 37255,23675 37255,23785 37210,23830 v1(37210,23840)
  Bottom Layer w50: v1@36670,24670 v1(36675,24670) v1(37190,24670)
  other v1: 34900,23380
VDDA: C18.2 C19.2 R10.2 U5.9 | length 1010.8
  Top Layer w10: U5.9 37273.31,24059.21 37300,24085.9 37300,24215 37265,24250 37265,24473.15 cw(c37335,24473.15) C18.2
  Top Layer w30: C19.2 37661.3,24543.15 ccw(c37661.3,24640) R10.2
VSSA: C18.1 C19.1 R12.2 U5.8 | length 1349.3
  Top Layer w10: U5.8 37299.53,24039.53 37335,24075 C18.1
  Top Layer w30: C19.1 37725.43,24436.85 ccw(c37725.43,24536.85) 37796.14,24466.14 37850,24520 37850,24773.15 R12.2
pads on no net: U3.4 U4.2 U4.3 U4.6 U4.8 U4.9 U4.10 U4.11 U4.12 U4.13 U4.14 U4.19 U4.22 U4.23 U4.24

## Polygon pours and split planes (outlines as drawn)
GND on Bottom Layer "Bottom Layer-No Net" (solid, remove dead copper, pour order 6): 34611,25465 34611,22304 34612,22305 38165,22305 38165,25465
GND on Top Layer "Bottom Layer-No Net" (solid, remove dead copper, pour order 8): 34612,25466 34609,25463 34609,22306 38165,22306 38166,22305 38164,22307 38164,25464 38164,25465

## Other copper
Top Layer:
  rectangle net GND: 35125,25220 35215,25300
  rectangle net VCC-3.3: 36372.24,23325 36595,23365
  rectangle net VSSA: 37300,24415 37480,24460
  rectangle net VDDA: 37300,24515 37480,24570
  rectangle net GND: 37075,24820 37520,24875
  rectangle net VCC-3.3: 37070,24710 37525,24765
  rectangle net VCC-3.3: 36465,24650 36710,24760
  rectangle net GND: 36470,24820 36715,24890
  rectangle net VCC-3.3: 36100,24525 36405,24560
  rectangle net NetR2_2: 36335,24615 36405,24705
  rectangle net GND: 37925,23870 38010,24335
  rectangle net GND: 37580,23840 38010,23905
  rectangle net GND: 37825,23495 37905,23715
  rectangle net NetLED1_1: 35005,22710 35110,23895
  rectangle net GND: 34765,25025 34965,25080
  rectangle net USB-VCC: 35395,24850 35450,25241
  rectangle net USB-VCC: 35395,24825 35935,24875
  rectangle net USB-VCC: 35935,24825 36090,24875
  rectangle net GND: 35690,24690 35935,24735
  rectangle net GND: 37625,23710 37885,23745
  rectangle net GND: 37625,23455 37875,23485
  rectangle net GND: 37580,24265 38000,24335
  region net USB-VCC: 35313,25254 35333,25234 35447,25234 35449,25236 35449,25206 35311,25206 35308,25209 35308,25254
  region net VCC-3.3: 37235,24645 37085,24645 37085,24695 37070,24710 37235,24710
  region net VCC-3.3: 36340,24560 36345,24565 36470,24560 36470,24660 36480,24680 36565,24680 36565,24555 36525,24520 36340,24520
  region net GND: 37230,22990 37390,22990 37390,22935 37300,22935 37300,22945 37230,22945

## Silkscreen, mask and mechanical layers (free items; w line width, h text height)
Top Overlay:
  lines w10: 34985,22860 35547.93,22860 cw(c35547.93,22842.93) 35560,22855 ; 34985,23005 35547.93,23005 cw(c35547.93,22987.93) 35560,23000 ; 34985,23155 35560,23155 ; 34985,23305 35547.93,23305 ccw(c35547.93,23322.07) 35560,23310 ; 34985,23465 35560,23465 ; 34985,23600 35547.93,23600 cw(c35547.93,23582.93) 35560,23595 ; 34985,23750 35547.93,23750 cw(c35547.93,23732.93) 35560,23745 ; 35280,23900 35280,22727.07 ccw(c35297.07,22727.07) 35285,22715 ; 35865,23895 36052.93,23895 ccw(c36052.93,23912.07) 36065,23900 36065,24225 36045,24225 35877.07,24225 ccw(c35877.07,24207.93) 35865,24220 35865,24095 36065,24095 ; 35865,24000 36065,24000 ; 36475,22600 37475,22600 37475,22595 ; 36560,22880 36575,22880 36575,22330 ; 36680,22330 36680,22880 ; 36765,22880 36780,22880 36780,22330 ; 36875,22330 36875,22880 ; 36970,22880 36975,22880 36975,22330 ; 37070,22875 37080,22875 37080,22330 ; 37160,22880 37180,22880 37180,22330 ; 37275,22330 37275,22880 ; 37370,22330 37370,22880 ; 37475,22495 37475,22330 36475,22330 36475,22690 36475,22880 37475,22880 37475,22695 ; 34985,22715 35515.86,22715 35550,22715 ccw(c35525.86,22739.14) 35560,22739.14 35560,22753.28 35560,23885 ccw(c35523.79,23848.79) 35523.79,23900 34985,23900 34985,22715
  text "KindSword" at 37210,25360 h60
  text "^" at 37485,25150 h60
  text "5V" at 34800,23270 h35
  text "3.3V" at 34800,23055 h35
  text "^" at 38085,23055 h60
  text "PB7" at 37135,22725 h35 r90
  text "PB9" at 37235,22725 h35 r90
  text "VCC" at 37340,22725 h35 r90
  text "PB10" at 36745,22720 h35 r90
  text "PA14" at 36840,22720 h35 r90
  text "PB3" at 36940,22720 h35 r90
  text "PB5" at 37040,22720 h35 r90
  text "3.3V" at 37445,22720 h35 r90
  text "PB14" at 36535,22715 h35 r90
  text "PB13" at 36640,22715 h35 r90
  text "PB12" at 36645,22350 h35 r90
  text "PB11" at 36745,22350 h35 r90
  text "PA15" at 36845,22350 h35 r90
  text "PB4" at 36950,22350 h35 r90
  text "PB6" at 37045,22350 h35 r90
  text "PB8" at 37140,22350 h35 r90
  text "PC13" at 37245,22350 h35 r90
  text "GND" at 37345,22350 h35 r90
  text "GND" at 37445,22350 h35 r90
  text "PB15" at 36540,22345 h35 r90

## Dimensions
34615,25540 to 38165,25550 on Top Layer
34515,25470 to 34480,22315 on Top Layer

## Text inside footprints (layer, text, board x,y; h text height)
MCU: Top Overlay "TX" at 35885,24025 h50; Top Overlay "RX" at 35565,24035 h50; Top Overlay "TX" at 35565,23915 h50; Top Overlay "RX" at 35885,23920 h50